# Altium PCB arduino.PcbDoc
Units mm, origin at the board's own origin, x right, y up, seen from the top; angles counter-clockwise.
Board outline 86.13 x 65.52 mm, 2 copper layers (Top Layer, Bottom Layer); 57 components, 54 nets, 236 pads, 41 vias.
Unrouted connection lines stored in the file: 4.
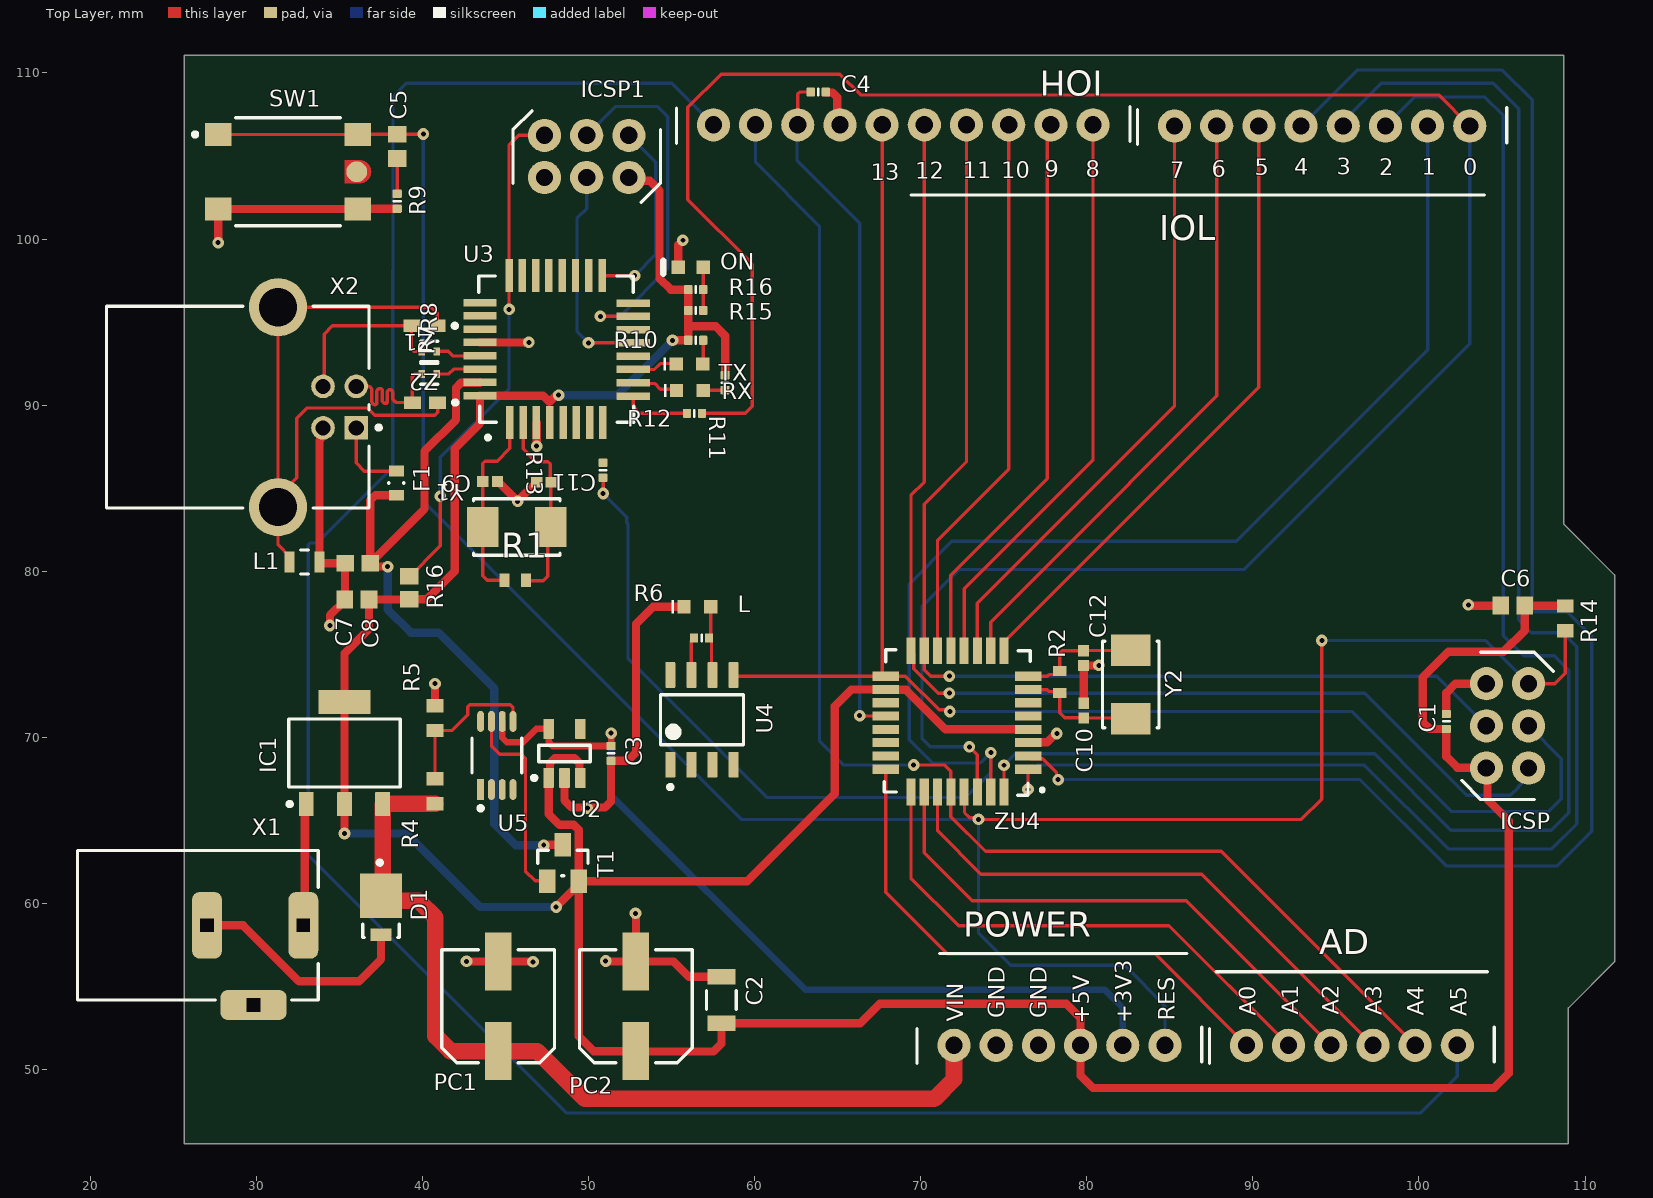
[diagram p0: Top Layer view]
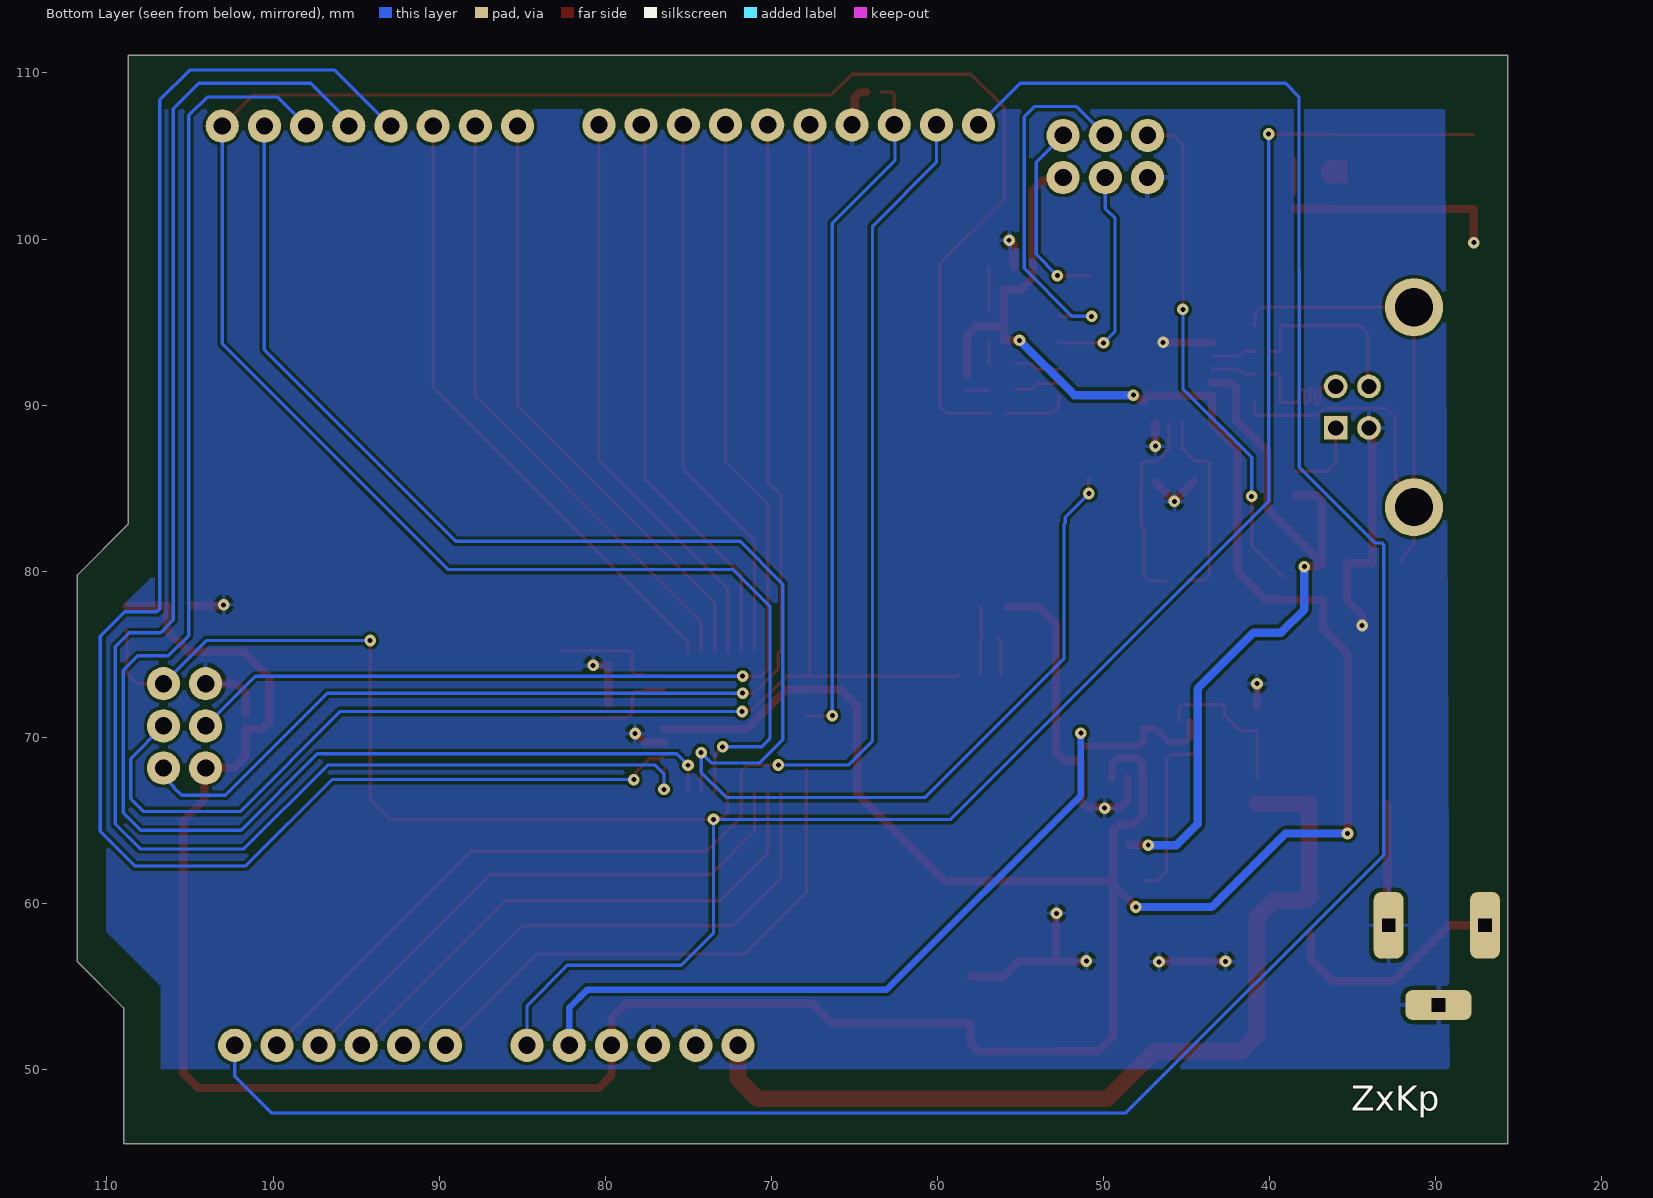
[diagram p1: Bottom Layer view, seen from below]
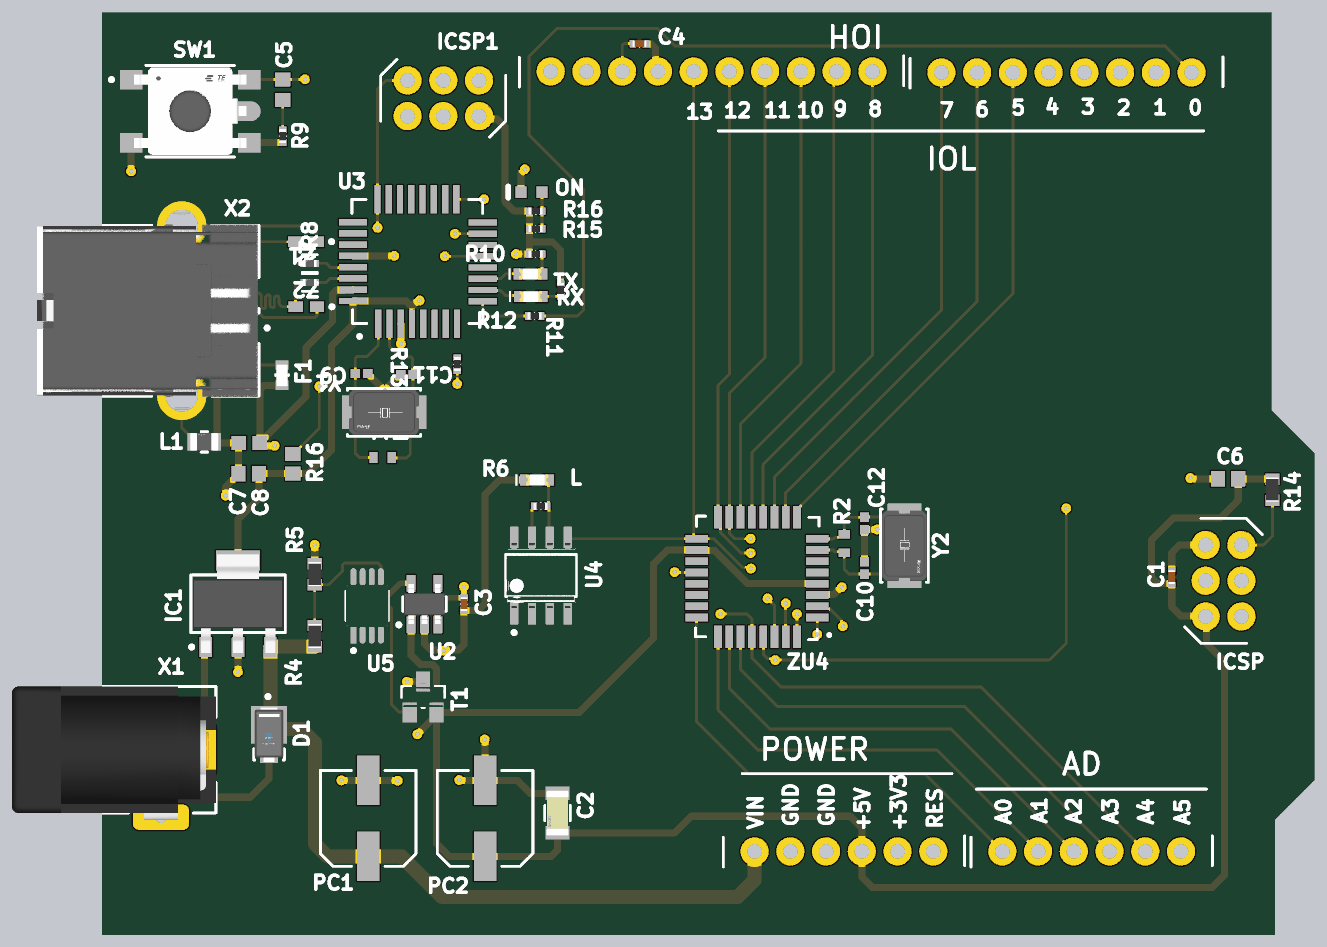
[diagram p2: 3D render of the assembled board from above, using the file's embedded part models]

## Layer stack, top to bottom
Top Solder: solder mask 0.0102, Solder Resist, Dk 3.5
Top Layer: signal copper 0.0356
Dielectric 1: dielectric 0.32, FR-4, Dk 4.8
Bottom Layer: signal copper 0.0356
Bottom Solder: solder mask 0.0102, Solder Resist, Dk 3.5

## Board outline
25.65,45.525 25.65,111.05 108.725,111.05 108.725,82.825 111.775,79.775 111.775,56.475 109,53.7 109,45.525

## Design rules (kind name [scope] priority, off if disabled: settings)
AssemblyTestPointUsage [All] p1: isadvanced=TRUE
AssemblyTestpoint [All] p1: isadvanced=TRUE testpointundercomponent=TRUE minsize=1.016 maxsize=2.54 preferedsize=1.524 minholesize=0 maxholesize=1.016 preferedholesize=0.813 testpointgrid=0.025 usegrid=TRUE gridtolerance=0 allowsidetop=TRUE allowsidebottom=TRUE
Clearance Clearance_3 [All] p1: isadvanced=TRUE gap=0.2 ignorepadtopadclearanceinfootprint=FALSE
Clearance Clearance_2 [All] p2: isadvanced=TRUE gap=0.2 ignorepadtopadclearanceinfootprint=FALSE
Clearance Clearance_1 [All] p3: isadvanced=TRUE gap=0.2 ignorepadtopadclearanceinfootprint=FALSE
Clearance [All] p4: isadvanced=TRUE gap=0.2 ignorepadtopadclearanceinfootprint=FALSE
Clearance Clearance_4_1 [OnMid vs OnMid] p5: gap=0.2 ignorepadtopadclearanceinfootprint=FALSE sourcerule=45 cellrowname=All cellrowtype=0 cellcolname=All cellcoltype=0 innerlayers=TRUE
Clearance Clearance_4_2 [(ExistsOnLayer('Top Layer') Or ExistsOnLayer('Bottom Layer')) vs (ExistsOnLayer('Top Layer') Or ExistsOnLayer('Bottom Layer'))] p6: gap=0.2 ignorepadtopadclearanceinfootprint=FALSE sourcerule=45 cellrowname=All cellrowtype=0 cellcolname=All cellcoltype=0 outerlayers=TRUE
Clearance Clearance_4 [All] p7: gap=0.2 ignorepadtopadclearanceinfootprint=FALSE ismatrix=TRUE
ComponentClearance [All] p1: isadvanced=TRUE gap=0.254 collisioncheckmode=3 verticalgap=0.254 showdistances=FALSE
FabricationTestPointUsage [All] p1: isadvanced=TRUE valid=0 allowmultiple=FALSE
FabricationTestpoint [All] p1: isadvanced=TRUE side=3 testpointundercomponent=TRUE minsize=1.016 maxsize=2.54 preferedsize=1.524 minholesize=0 maxholesize=1.016 preferedholesize=0.813 testpointgrid=0.025 allowsidetop=TRUE allowsidebottom=TRUE usegrid=TRUE gridtolerance=0
FanoutControl Fanout_BGA [IsBGA] p1: isadvanced=TRUE bgadir=Out bgaviamode=Centered fanoutstyle=Auto fanoutdirection=Alternating viagrid=0.025 // Fanout_BGA (Default Rule)
FanoutControl Fanout_LCC [IsLCC] p2: isadvanced=TRUE bgadir=Out bgaviamode=Centered fanoutstyle=Auto fanoutdirection=Alternating viagrid=0.025 // Fanout_LCC (Default Rule)
FanoutControl Fanout_SOIC [IsSOIC] p3: isadvanced=TRUE bgadir=Out bgaviamode=Centered fanoutstyle=Auto fanoutdirection=Alternating viagrid=0.025 // Fanout_SOIC (Default Rule)
FanoutControl Fanout_Small [(CompPinCount < 5)] p4: isadvanced=TRUE bgadir=Out bgaviamode=Centered fanoutstyle=Auto fanoutdirection=OutThenIn viagrid=0.025 // Fanout_Small (Default Rule)
FanoutControl Fanout_Default [All] p5: isadvanced=TRUE bgadir=Out bgaviamode=Centered fanoutstyle=Auto fanoutdirection=Alternating viagrid=0.025 // Fanout_Default (Default Rule)
Height [All] p1: isadvanced=TRUE minheight=0 maxheight=25.4 prefheight=12.7
HoleSize [All] p1: isadvanced=TRUE absolutevalues=TRUE maxlimit=2.54 minlimit=0.025 maxpercent=80.000 minpercent=20.000
HoleToHoleClearance [All] p1: isadvanced=TRUE gap=0.254 allowstackedmicrovias=TRUE
LayerPairs [All] p1: isadvanced=TRUE enforce=TRUE
MinimumSolderMaskSliver [All] p1: isadvanced=TRUE minsoldermaskwidth=0.254
NetAntennae [All] p1: isadvanced=TRUE netantennaetolerance=0
PasteMaskExpansion [All] p1: isadvanced=TRUE expansion=0
PlaneClearance [All] p1: isadvanced=TRUE clearance=0.508
PlaneConnect [All] p1: isadvanced=TRUE planeconnectstyle=Relief reliefexpansion=0.508 reliefentries=4 reliefconductorwidth=0.254 reliefairgap=0.254
PolygonConnect [All] p1: connectstyle=Relief reliefconductorwidth=0.254 reliefentries=4 polygonreliefangle="90 Angle" airgapwidth=0.254
RoutingCorners [All] p1: isadvanced=TRUE cornerstyle=45-Degree minsetback=2.54 maxsetback=2.54
RoutingPriority [All] p1: isadvanced=TRUE routingpriority=0
RoutingVias RoutingViaStyle_1 [All] p1: isadvanced=TRUE holewidth=0.3 width=0.7 viastyle="Through Hole" minholewidth=0.3 minwidth=0.6 maxholewidth=0.3 maxwidth=0.7
RoutingVias [All] p2: holewidth=0.711 width=1.27 viastyle="Through Hole" minholewidth=0.711 minwidth=1.27 maxholewidth=0.711 maxwidth=1.27
ShortCircuit [All] p1: isadvanced=TRUE allowed=FALSE
SilkToSilkClearance [All] p1: isadvanced=TRUE silktosilkclearance=0.254
SilkToSolderMaskClearance [IsPad] p1: isadvanced=TRUE minsilkscreentomaskgap=0.254 clearancetoexposedcopper=TRUE
SolderMaskExpansion [All] p1: isadvanced=TRUE expansion=0.102 istentingtop=FALSE
SupplyNets "Schematic Supply Nets_2" [InNet('GND')] p1: isadvanced=TRUE voltage=0.000
SupplyNets "Schematic Supply Nets_1" [InNet('+3V3')] p2: isadvanced=TRUE voltage=0.000
SupplyNets "Schematic Supply Nets" [InNet('+5V')] p3: isadvanced=TRUE voltage=0.000
UnRoutedNet [All] p1: isadvanced=TRUE
UnpouredPolygon [All] p1: isadvanced=TRUE
Width MaxMinWidth_1 [All] p1: isadvanced=TRUE maxlimit=1 minlimit=0.2 preferedwidth=0.2 minimp=50.000000 maximp=50.000000 favimp=50.000000
Width [All] p2: maxlimit=0.254 minlimit=0.254 preferedwidth=0.254
4 further rules are at their usual default settings.

## Components (designator, comment, footprint, x,y, rotation, side; value= is the part's Value field where it differs from the comment)
AD "6pins header" 6pinheader#1 89.609,51.45 r0 top
C1 "Capacitor 100nF +/-20% 50V 0402" CAPC0402(1005)60_L 101.65,70.95 r270 top value=100nF
C2 "100n" FP-C1206C-EB-MFG 58,54.175 r90 top value="0.10 μF"
C3 "Capacitor 1µF +/-20% 10V 0402" CAPC0402(1005)60_L 51.354,69.025 r270 top value=1µF
C4 "Capacitor 100nF +/-20% 50V 0402" CAPC0402(1005)60_L 63.825,108.85 r0 top value=100nF
C5 "100nF" CAPC1608X87X35ML15T15 38.475,105.575 r270 top
C6 "100nF" CAPC1608X87X35ML15T15 105.65,77.925 r0 top
C7 "100nF" CAPC1608X87X35ML15T15 36.05,78.296 r0 top
C8 "1nF" CAPC1608X90X35NL15T15 36.1,80.475 r0 top
C9 "22p" CAPC1005X56X25NL10T15 44.075,85.4 r180 top
C10 "22p" CAPC1005X56X25NL10T15 79.825,71.6 r270 top
C11 "22p" CAPC1005X56X25NL10T15 47.31,85.35 r0 top
C12 "22p" CAPC1005X56X25NL10T15 79.8,74.76 r90 top
D1 "AS1PM-M3/84A" FP-96547-MFG 37.5,59.75 r270 top value=10.4pF
F1 "SF-0603S050-2" FP-SF-0603S-MFG 38.425,85.3 r270 top value=232mΩ
IC1 "REG1117A-2.5" DCY0004A_L 35.3,69.05 r90 top
ICSP "2x3 header" header2x3 106.6,68.145 r90 top
ICSP1 "2x3 header" header2x3 52.425,106.24 r180 top
IOH "10pins header" "10pin header" 80.376,106.875 r180 top
IOL "8pin header" 8pin 103.06,106.8 r180 top
L "150060YS75000" WL-SMCW_0603_150060xx75000 56.55,77.85 r0 top
L1 "BLM21AG601SH1D" FP-BLM21-0_2-t0_85-e0_5-MFG 32.9,80.55 r180 top
ON "HSMG-C190" AVAG-HSMX-C190_V 56.15,98.3 r180 top
PC1 "47uF" NIC-CAPA2-6.3X5.8_V 44.55,53.8 r90 top
PC2 "47uF" NIC-CAPA2-6.3X5.8_V 52.85,53.8 r90 top
POWER "6pins header" 6pinheader#2 84.705,51.45 r180 top
R1 "1M" RESC1608X55X25LL10T15 45.575,79.45 r0 top
R2 "1M" RESC1608X55X25LL10T15 78.375,73.325 r90 top
R4 "Resistor 10k +/-1% 0603 100 mW" RESC1608X55X25ML10T15 40.75,66.75 r270 top value=10k
R5 "Resistor 10k +/-1% 0603 100 mW" RESC1608X55X25ML10T15 40.75,71.15 r270 top value=10k
R6 "Resistor 1K +/-5 % 0402 63 mW" RESC0402(1005)_L 56.8,75.975 r180 top value=1k
R7 "22E" FP-ESR01-MFG 40.4,91.875 r0 top
R8 "22E" FP-ESR01-MFG 40.4,93.225 r0 top
R9 "Resistor 1K +/-5 % 0402 63 mW" RESC0402(1005)_L 38.475,102.275 r90 top value=1k
R10 "Resistor 1K +/-5 % 0402 63 mW" RESC0402(1005)_L 56.45,93.9 r180 top value=1k
R11 "Resistor 1K +/-5 % 0402 63 mW" RESC0402(1005)_L 58.225,91.35 r90 top value=1k
R12 "Resistor 1K +/-5 % 0402 63 mW" RESC0402(1005)_L 56.375,89.5 r0 top value=1k
R13 "Resistor 1K +/-5 % 0402 63 mW" RESC0402(1005)_L 50.875,86.075 r270 top value=1k
R14 "Resistor 10k +/-1% 0603 100 mW" RESC1608X55X25ML10T15 108.8,77.154 r90 top value=10k
R15 "Resistor 1K +/-5 % 0402 63 mW" RESC0402(1005)_L 56.45,95.7 r0 top value=1k
R16 "Resistor 1K +/-5 % 0402 63 mW" RESC0402(1005)_L 56.45,96.95 r0 top value=1k
R16 "10k" RESC1608X50X30ML20T20 39.2,79 r270 top
RX "150060YS75000" WL-SMCW_0603_150060xx75000 56.1,90.875 r0 top
SW1 "FSM1LP" FP-FSM1LP-MFG 31.9,104.05 r0 top
T1 "FDN308P" FP-527AG-MFG 48.45,62.425 r90 top
TX "RX" WL-SMCW_0603_150060xx75000 56.075,92.475 r0 top
U2 "LP2985-33DBVR" DBV0005A_M 48.55,69.025 r90 top
U3 "ATMEGA8U2-MU" PCBComponent_1 47.975,93.319 r90 top
U4 "LM358DR" FP-D0008A-MFG 56.825,71.05 r90 top
U5 "LMV358IDGKR" FP-DGK0008A-IPC_C 44.475,68.9 r90 top
X1 "694106301002" 694106301002 26.475,58.675 r270 top
X2 "292304-2" FP-292304-2-MFG 28.875,89.875 r270 top
Y1 "16MHz" FP-ABM3-MFG 45.675,82.65 r180 top
Y2 "16MHz" FP-ABM3-MFG 82.65,73.175 r270 top
Z1 "CG0603MLC-05E" BOUR-CG0603-2_V 40.125,94.775 r180 top
Z2 "CG0603MLC-05E" BOUR-CG0603-2_V 40.15,90.15 r180 top
ZU4 "ATMEGA8" ATmega328P 72.175,70.95 r180 top

## Footprints (in the part's own frame and the unit in brackets; to place one, negate y for a bottom-side part, rotate by r counter-clockwise, add the part's x,y. Pads: shape width x height; smd on the part's side, far side on the other; paste and mask are expansions set on the pad)
6pinheader#1 [mm]
  round 2 hole 1.04: 71(0,0) 71(0,0) 71(0,0) 72(2.54,0) 73(5.08,0) 74(7.62,0) 75(10.16,0) 76(12.7,0)
  silkscreen extent -2.22,-1.1 14.92,1.1
6pinheader#2 [mm]
  round 2 hole 1.04: 1(0,0) 1(0,0) 2(2.54,0) 3(5.08,0) 4(7.62,0) 5(10.16,0) 6(12.7,0)
  silkscreen extent -2.22,-1.1 14.92,1.1
8pin [mm]
  round 2 hole 1.04: 78(0,0) 78(0,0) 78(0,0) 79(2.54,0) 80(5.08,0) 81(7.62,0) 82(10.16,0) 83(12.7,0) 84(15.24,0) 85(17.78,0)
  silkscreen extent -2.22,-1.1 20,1.1
"10pin header" [mm]
  round 2 hole 1.04: 86(0,0) 86(0,0) 87(2.54,0) 88(5.08,0) 89(7.62,0) 90(10.16,0) 91(12.7,0) 92(15.24,0) 93(17.78,0) 94(20.32,0) 95(22.86,0)
  silkscreen extent -2.22,-1.1 25.08,1.1
694106301002 [mm] "DC Power Jack Right Angled(6.4)"
  rrect50% 4x1.8 hole 0.8 square: 1(0,6.35) 2(0,0.55)
  rrect50% 1.8x4 hole 0.8 square: 3(4.8,3.35)
  silkscreen extent -4.5,-7.25 4.5,7.25, body extent -4.5,-7.25 5,7.25, height 10.75
ATmega328P [mm]
  rect 1.6x0.55 smd: 33(-4.287,2.875) 34(-4.287,2.075) 35(-4.287,1.275) 36(-4.287,0.475) 37(-4.287,-0.325) 38(-4.287,-1.125) 39(-4.287,-1.925) 40(-4.287,-2.725) 49(4.288,-2.725) 50(4.288,-1.925) 51(4.288,-1.125) 52(4.288,-0.325) 53(4.288,0.475) 54(4.288,1.275) 55(4.288,2.075) 56(4.288,2.875)
  rect 0.55x1.6 smd: 41(-2.837,-4.25) 42(-2.037,-4.25) 43(-1.237,-4.25) 44(-0.437,-4.25) 45(0.363,-4.25) 46(1.163,-4.25) 47(1.963,-4.25) 48(2.763,-4.25) 57(2.763,4.25) 58(1.963,4.25) 59(1.163,4.25) 60(0.363,4.25) 61(-0.437,4.25) 62(-1.237,4.25) 63(-2.037,4.25) 64(-2.837,4.25)
  silkscreen extent -5.22,-4.33 4.36,4.45
AVAG-HSMX-C190_V [mm] "SMD, 2-Leads, Body 1.6x0.8mm, Height 0.9mm"
  rect 0.8x0.8 smd: 1(-0.75,0) 2(0.75,0)
  silkscreen extent 1.65,-0.4 1.65,0.4, body extent -0.8,-0.4 0.8,0.4, height 0.9
BOUR-CG0603-2_V [mm] "SMD, 2-Leads, Body 1.6x0.8mm, Pitch 1.52mm"
  rect 1.02x0.76 smd: 1(-0.76,0) 2(0.76,0)
  silkscreen extent -1.94,-0.12 -1.7,0.12, body extent -0.8,-0.4 0.8,0.4, height 0.55
CAPC0402(1005)60_L [mm] "Chip Capacitor, Body 1.0x0.5mm, Height 0.6mm, IPC High Density"
  rrect25% 0.5x0.55 smd: 1(-0.45,0) 2(0.45,0)
  silkscreen extent 0,-0.2 0,0.2, body extent -0.5,-0.25 0.5,0.25, height 0.6
CAPC1005X56X25NL10T15 [mm] "Chip Capacitor, 2-Leads, Body 1.00x0.50mm, IPC Medium Density"
  rect 0.68x0.64 smd: 1(-0.44,0) 2(0.44,0)
  body extent -0.55,-0.3 0.55,0.3, height 0.56
CAPC1608X87X35ML15T15 [mm] "Chip Capacitor, 2-Leads, Body 1.60x0.80mm, IPC Low Density"
  rect 1x1.1 smd: 1(-0.725,0) 2(0.725,0)
  body extent -0.87,-0.48 0.87,0.47, height 0.87
CAPC1608X90X35NL15T15 [mm] "Chip Capacitor, 2-Leads, Body 1.60x0.81mm, IPC Medium Density"
  rect 1.05x1 smd: 1(-0.75,0) 2(0.75,0)
  body extent -0.88,-0.48 0.87,0.48, height 0.9
DBV0005A_M [mm] "SOT23, 5-Leads, Body 3.05x1.75mm, Pitch 0.95mm, IPC Low Density"
  rrect15% 1.2x0.65 smd: 1(-1.475,0.95) 2(-1.475,0) 3(-1.475,-0.95) 4(1.475,-0.95) 5(1.475,0.95)
  silkscreen extent -1.6,-1.55 0.5,1.95, body extent -1.42,-1.46 1.42,1.46, height 1.08
DCY0004A_L [mm] "SOT223, 4-Leads, Body 6.7x3.7mm, Pitch 2.3mm, IPC High Density"
  rrect11% 1.45x0.9 smd: 1(-3.075,2.3) 2(-3.075,0) 3(-3.075,-2.3)
  rrect7% 1.45x3.15 smd: 4(3.075,0)
  silkscreen extent -3.2,-3.35 2.05,3.42, body extent -3.5,-3.25 3.5,3.25, height 1.62
FP-527AG-MFG [mm]
  rect 1.4x1 smd paste+0 mask+0: 1(-1.1,0.95) 2(-1.1,-0.95) 3(1.1,0)
  silkscreen extent -0.76,-1.52 0.76,1.52, body extent -1.9,-1.62 1.9,1.62, height 0.25
FP-96547-MFG [mil]
  rect 105.12x100 smd paste+0 mask+0: 1(-27.5,0)
  rect 30x50 smd paste+0 mask+0: 2(65.06,0)
  silkscreen extent -111,-43 71,43, body extent -84,-54 84,54, height 10
FP-292304-2-MFG [mm]
  rect 1.42x1.42 hole 0.92 paste-2539.97 mask+0: 1(1.25,7.135)
  round 1.42 hole 0.92 paste-2539.97 mask+0: 2(-1.25,7.135) 3(-1.25,5.135) 4(1.25,5.135)
  round 3.5 hole 2.3 paste-2539.97 mask+0: 5(-6.02,2.425) 6(6.02,2.425)
  silkscreen extent -6.07,-7.91 6.07,8.61, body extent -7.87,-8.01 7.87,8.01, height 0.25
FP-ABM3-MFG [mm]
  rect 1.9x2.4 smd paste+0 mask+0: 1(-2.05,0) 2(2.05,0)
  silkscreen extent -2.6,-1.7 2.6,1.7, body extent -3.1,-1.8 3.1,1.8, height 0.25
FP-BLM21-0_2-t0_85-e0_5-MFG [mm]
  rect 0.6x1.25 smd paste+0 mask+0: 1(-0.9,0) 2(0.9,0)
  silkscreen extent -0.23,-0.72 0.23,0.72, body extent -1.3,-0.82 1.3,0.82, height 0.25
FP-C1206C-EB-MFG [mm]
  rect 0.95x1.7 smd paste+0 mask+0: 1(-1.4,0) 2(1.4,0)
  silkscreen extent -0.55,-0.9 0.55,0.9, body extent -2,-1 2,1, height 0.25
FP-D0008A-MFG [mm]
  rrect17% 1.55x0.6 smd paste+0 mask+0: 1(-2.7,1.905) 2(-2.7,0.635) 3(-2.7,-0.635) 4(-2.7,-1.905) 5(2.7,-1.905) 6(2.7,-0.635) 7(2.7,0.635) 8(2.7,1.905)
  silkscreen extent -4.17,-2.5 1.5,2.5, body extent -3.57,-2.75 3.57,2.75, height 0.25
FP-DGK0008A-IPC_C [mm]
  rect 1.257x0.418 smd paste+0 mask+0: 1(-2.051,0.975)
  rrect100% 1.257x0.418 smd paste+0 mask+0: 2(-2.051,0.325) 3(-2.051,-0.325) 4(-2.051,-0.975) 5(2.051,-0.975) 6(2.051,-0.325) 7(2.051,0.325) 8(2.051,0.975)
  silkscreen extent -3.3,-1.5 1.05,1.5, body extent -2.78,-1.6 2.78,1.6, height 0.25
FP-ESR01-MFG [mm]
  rect 0.4x0.5 smd paste+0 mask+0: 1(-0.45,0) 2(0.45,0)
  silkscreen extent -0.53,-0.63 0.53,0.63, body extent -0.75,-0.38 0.75,0.38, height 0.25
FP-FSM1LP-MFG [mm]
  rect 1.6x1.395 smd paste+0 mask+0: 1(-4.205,2.248) 2(4.205,2.248) 3(-4.205,-2.248) 4(4.205,-2.248)
  round 1.26 smd paste+0 mask+0: 5(4.139,0)
  Top Layer region: 3.405,0.7 4.307,0.7 4.574,0.647 4.801,0.496 4.952,0.269 5.005,0.002 5.005,0.002 5.005,-0.002 4.952,-0.269 4.801,-0.496 4.574,-0.647 4.307,-0.7 4.307,-0.7 3.405,-0.7
  silkscreen extent -5.72,-3.25 3.15,3.25, body extent -5.1,-3.35 5.11,3.35, height 0.25
FP-SF-0603S-MFG [mm]
  rect 0.65x0.9 smd paste+0 mask+0: 1(-0.725,0) 2(0.725,0)
  silkscreen extent -0.03,-0.45 0.03,0.45, body extent -1.15,-0.55 1.15,0.55, height 0.25
header2x3 [mm]
  round 2 hole 1.04: 65(0,0) 66(0,2.54) 67(2.54,0) 68(2.54,2.54) 69(5.08,0) 70(5.08,2.54)
  silkscreen extent -1.9,-1.49 6.98,4.03
NIC-CAPA2-6.3X5.8_V [mm] "Aluminum Electrolytic Capacitor, Diameter 6.3mm, Height 6.1mm, Pitch 5.4mm"
  rect 3.5x1.6 smd: 1(-2.7,0) 2(2.7,0)
  silkscreen extent -3.4,-3.4 3.4,3.4, body extent -3.14,-3.12 3.14,3.15, height 6.1
PCBComponent_1 [mm]
  rect 2x0.45 smd: 1(-4.375,2.713) 2(-4.375,1.913) 3(-4.375,1.113) 4(-4.375,0.313) 5(-4.375,-0.487) 6(-4.375,-1.287) 7(-4.375,-2.087) 8(-4.375,-2.887) 17(4.475,-2.837) 18(4.475,-2.037) 19(4.475,-1.237) 20(4.475,-0.437) 21(4.475,0.363) 22(4.475,1.163) 23(4.475,1.963) 24(4.475,2.763)
  rect 0.45x2 smd: 9(-2.775,-4.712) 10(-1.975,-4.712) 11(-1.175,-4.712) 12(-0.375,-4.712) 13(0.425,-4.712) 14(1.225,-4.712) 15(2.025,-4.712) 16(2.825,-4.712) 25(2.85,4.513) 26(2.05,4.513) 27(1.25,4.513) 28(0.45,4.513) 29(-0.35,4.513) 30(-1.15,4.513) 31(-1.95,4.513) 32(-2.75,4.513)
  silkscreen extent -5.39,-4.74 4.45,4.59
RESC0402(1005)_L [mm] "Chip Resistor, Body 1.0x0.5mm, IPC High Density"
  rrect25% 0.5x0.55 smd: 1(-0.45,0) 2(0.45,0)
  silkscreen extent 0,-0.2 0,0.2, body extent -0.5,-0.25 0.5,0.25, height 0.3
RESC1608X50X30ML20T20 [mm] "Chip Resistor, 2-Leads, Body 1.60x0.80mm, IPC Low Density"
  rect 1x1.1 smd: 1(-0.7,0) 2(0.7,0)
  body extent -0.9,-0.5 0.9,0.5, height 0.5
RESC1608X55X25LL10T15 [mm] "Chip Resistor, 2-Leads, Body 1.70x0.90mm, IPC High Density"
  rect 0.6x0.8 smd: 1(-0.65,0) 2(0.65,0)
  body extent -0.85,-0.45 0.85,0.45, height 0.55
RESC1608X55X25ML10T15 [mm] "Chip Resistor, 2-Leads, Body 1.70x0.90mm, IPC Low Density"
  rect 0.8x1 smd: 1(-0.75,0) 2(0.75,0)
  body extent -0.85,-0.45 0.85,0.45, height 0.55
WL-SMCW_0603_150060xx75000 [mm] "SMD Mono-color Chip LED, body 1.6x0.8mm"
  rect 0.8x0.8 smd: 1(-0.8,0) 2(0.8,0)
  silkscreen extent -1.55,-0.4 -1.4,0.4, body extent -0.8,-0.4 0.8,0.4, height 0.7

## Part data
C1 C4: library part CMP-001-00067-3, "Chip Capacitor, 100nF +/-20%, 50V, 0402, Thickness 0.6 mm", Case/Package=0402, Max Operating Temperature=85°C, Min Operating Temperature=-55°C, Tolerance=10%, Voltage Rating=50V, Mounting Technology=SMT, Pins=2
C2: library part CMP-1037-04222-2, "CAP CER 0.1UF 200V 10% X7R 1206", Capacitance="0.10 μF", Manufacturer=KEMET, Manufacturer Part Number=C1206C104K2RACTU, Package=C1206C-EB, Temperature="-55°C to +150°C", Temperature Characteristic=X7R, Temperature Coefficient=15%, Temperature Range High=+150°C, Temperature Range Low=-55°C, Tolerance=0.1, Voltage Rating="200 V", Automotive=Yes, Automotive Grade="Grade 0", Category=Cap, ComponentLink2Description=Datasheet, ComponentLink2URL=https://content.kemet.com/datasheets/KEM_C1007_X8R_ULTRA_150C_SMD.pdf, Device Class L1="Passive Components", Device Class L2=Capacitors, Device Class L3="Ceramic Capacitors", Digikey Description="CAP CER 0.1UF 200V 10% X7R 1206", Height=0.88mm, Ipc Land Pattern Name=CAPC320160X78, Lead Free=Yes, Material=Ceramic, Mouser Description="Multilayer Ceramic Capacitors MLCC - SMD/SMT 200volts 0.1uF X7R 10%", Octopart=https://octopart.com/c1206c104k2ractu-kemet-9138344, RoHS=TRUE
C3: library part CMP-001-00063-3, "Chip Capacitor, 1µF +/-20%, 10V, 0402, Thickness 0.6 mm", Case/Package=0402, Max Operating Temperature=85°C, Min Operating Temperature=-55°C, Tolerance=10%, Voltage Rating=10V, Mounting Technology=SMT, Pins=2
C5 C6 C7: library part CMP-2006-03295-1, Manufacturer=Kemet, Part Number=C0603T104K3RCLTU
C8: library part CMP-2006-04069-1, Manufacturer="AVX Interconnect / Elco", Part Number=06031C102KAT4A
C9 C10 C11 C12: library part CMP-1034-00918-2, Manufacturer="AVX Interconnect / Elco", Part Number=04025A220KAT2A
D1: library part CMP-02540-000039-1, "DIODE AVALANCHE 1KV 1.5A DO220", Capacitance=10.4pF, Forward Current=1.5A, Manufacturer=Vishay, Max Junction Temp=+175°C, Max Repetitive Reverse Voltage=1000V, Max Surge Forward Current=30A, Package=96547, Peak Reverse Current=0.3uA, Temperature="-55°C to +175°C", Temperature Range Low=-55°C, Automotive=Yes, Automotive Grade="Grade 0", Category=Diode, ComponentLink2Description=Datasheet, ComponentLink2URL=https://www.vishay.com/docs/89290/as1pm.pdf, Device Class L1="Discrete Semiconductors", Device Class L2=Diodes, Device Class L3="Rectifier Diodes", Digikey Description="DIODE AVALANCHE 1KV 1.5A DO220", Footprint Url=https://www.vishay.com/docs/96547/smp_do-220aa.pdf, Height=1.15mm, Lead Free=Yes, Manufacturer Part Number=AS1PM-M3/84A, Mouser Description="AS1PM-M3/84A; SMT Avalanche Diode; 1000V 1.5A; 1.5us; 2-Pin DO-220AA", Octopart=https://octopart.com/as1pm-m3%2F84a-vishay-44629776, RoHS=TRUE, Temperature Range High=+175°C
F1: library part CMP-07399-000004-1, "FUSE BOARD MNT 500MA 50VDC 0603", Fuse Current=0.5A, Fuse Interrupt Ac Current=50A, Manufacturer="Bourns Inc.", Max Fuse Ac Voltage=35V, Max Fuse Dc Voltage=50V, Package=SF-0603S, Resistance=232mΩ, Temperature="-20°C to +105°C", Temperature Range High=+105°C, Temperature Range Low=-20°C, Automotive=No, Category=Fuse, ComponentLink2Description=Datasheet, ComponentLink2URL=https://www.bourns.com/docs/product-datasheets/sf0603s.pdf, Device Class L1="Circuit Protection", Device Class L2=Fuses, Device Class L3=unset, Digikey Description="FUSE BOARD MNT 500MA 50VDC 0603", Fuse Blow Speed=Slow, Fuse I2T=0.009A2Sec, Fuse Interrupt Dc Current=50A, Height=0.55mm, Ipc Land Pattern Name=CAPC16080X45, Lead Free=Yes, Manufacturer Part Number=SF-0603S050-2, Mouser Description="Surface Mount Fuses 0.50A Slow Blow SinglFuse", Octopart=https://octopart.com/sf-0603s050-2-bourns-10486821, RoHS=TRUE
IC1: library part CMP-0395-00519-2, "Single Output LDO, 1 A, Fixed 2.5 V Output, 3.8 to 15 V Input, with Internal Current Limiting, 4-pin SOT-223 (DCY), -40 to 125 degC, Green (RoHS & no Sb/Br)", Manufacturer="Texas Instruments", Rating=Catalog, Code_JEDEC=TO-261, ComponentLink1Description="Manufacturer URL", ComponentLink1URL=http://www.ti.com/, ComponentLink2Description=Datasheet, ComponentLink2URL=http://www.ti.com/general/docs/lit/getliterature.tsp?genericPartNumber=REG1117A-25&fileType=pdf, ComponentLink3Description="Package Specification", ComponentLink3URL=http://www.ti.com/litv/pdf/mpds094a, DatasheetVersion=SBVS001D, Eco-Plan="Green (RoHS & no Sb/Br)", Fixed Output Options(V)=2.5, Iout(Max)(A)=1, Iq(Typ)(mA)=4, Mounting Technology="Surface Mount", PackageDescription="4-Pin Plastic Small Outline, Body 3.5 x 6.5 mm, Pitch 2.3 mm", PackageReference=DCY0004A, PackageVersion=4202506/B, PartNumber=REG1117A-2.5, SubFamily="Single Channel LDO", Vdo(Typ)(mV)=1200, Vin(Max)(V)=15, Vin(Min)(V)=3.8, Vout Adj(Max)(V)=2.5, Vout Adj(Min)(V)=2.5
L RX TX: library part CMP-1426-00005-2, Case Code (Imperial)=0603, Case Code (Metric)=1608, Color=Yellow, Forward Current=100mA, Forward Voltage=2V, Max Junction Temperature (Tj)=95°C, Max Operating Temperature=85°C, Max Reverse Voltage (DC)=5V, Min Operating Temperature=-40°C, Power Dissipation=72mW, Test Current=20mA, Case/Package=0603, Dominant Wavelength=590nm, Height=700µm, Length=1.6mm, Lens Style="Clear, Rectangular", Luminous Intensity=120mcd, Mount="Surface Mount", NexarPartId=29687085, Packaging="Tape and Reel", Peak Wavelength=595nm, REACH SVHC=Unknown, Reverse Voltage=5V, RoHS=Compliant, Viewing Angle=140°, Wavelength=590nm, Width=800µm
L1: library part CMP-06046-002599-1, "Chip Ferrite Bead, 0805, 600Ω @ 100MHz, 0.2Ω, 25%, 700mA", Case Code (Imperial)=0805, Case Code (Metric)=2012, DC Resistance (DCR)=210mR, Max Current Rating=600mA, Max DC Current=200mA, Max Operating Temperature=125°C, Min Operating Temperature=-55°C, Package Quantity=4000, Ratings=AEC-Q200, Test Frequency=100MHz, Tolerance=25%, Case/Package=0805, Contact Plating=Tin, Height=0.041inch, Impedance=600R, Lead Free="Lead Free", Length=2mm, Mount="Surface Mount", Number of Circuits=1, Number of Lines=1, Packaging="Tape and Reel", REACH SVHC="No SVHC", RoHS Compliant=Yes, Series="EMIFIL®, BLM21A", Termination=SMD/SMT, Width=0.049inch
ON: library part CMP-007-00013-2, "LED Uni-Color Green, 52 mW, 20 mA, -40 to 85 degC, 2-Pin SMD, RoHS, Tape and Reel", Case/Package=0603, Colour=Green, Forward Current=20mA, Forward Voltage=2.2V, Manufacturer=Avago, Max Operating Temperature=85°C, Min Operating Temperature=-40°C, Package Description="2-Pin Surface Mount Device, Body 1.6 x 0.8 mm, Height 0.9 mm", Package Quantity=4000, Package Reference=HSMX-C190, Power=52mW, Datasheet URL=http://docs.avagotech.com/docs/AV02-0551EN, Datasheet Version=Mar-12, Illumination Colour=Green, Lens Style=Diffused, Luminous Intensity=15mcd, Manufacturer URL=http://www.avagotech.com/, Mounting Technology=SM, Nominal Vf=2.2V, Packaging=TapeandReel, Pins=2, RoHS Compliant=True, Viewing Angle=170degrees
PC1 PC2: library part CMP-0687-00039-1, "Aluminum Electrolytic Capacitor, UD Series, Low Impedance, 47 uF, 25 V, + / - 20%, -55 to 105 degC, Chip Type, 6.3 x 5.8 mm D x L, Pb-Free, Reel", Manufacturer=Nichicon, PartNumber=UUD1E470MCL1GS, Rated Capacitance="47 uF", Rated Ripple Current (at 100kHz)="230 mA", Rated Voltage="25 V", Tolerance Rated Capacitance="-20 to 20%", ComponentLink1Description="Manufacturer URL", ComponentLink1URL=http://www.nichicon.co.jp/, ComponentLink2Description=Datasheet, ComponentLink2URL=http://products.nichicon.co.jp/en/pdf/XJA043/e-ud.pdf, ComponentLink3Description="Package Specification", ComponentLink3URL=http://products.nichicon.co.jp/en/pdf/XJA043/e-ud.pdf, DatasheetVersion=08/2012, Diameter="6.3 mm", Endurance Time="2000 h", Impedance="0.44 Ohm", Length="5.8 mm", Mounting Technology="Surface Mount", PackageDescription="2-Pin Surface Mount Device, Diameter 6.3 mm, Height 5.8 mm, Pitch 5.4 mm", PackageReference=CAPAE-D6.3H5.8, Packing="Dia382mm Reel", RoHS=TRUE
R1 R2: library part CMP-1659-00056-1, "Chip Resistor, 1 MOhm, +/- 1%, 100 mW, -55 to 155 degC, 0603 (1608 Metric), RoHS, Tape and Reel", Capacitance="1 mF", Case\Package=Radial, Max Operating Temperature="85 degC", Min Operating Temperature="-40 degC", Package Quantity=200, Tolerance=20%, Voltage Rating="25 V", ComponentLink1Description="Manufacturer URL", ComponentLink1URL=http://www.yageo.com/, ComponentLink2Description=Datasheet, ComponentLink2URL=http://www.yageo.com/documents/recent/PYu-RC_Group_51_RoHS_L_04.pdf, DatasheetVersion="Rev. 4, 02/2016", Diameter="10 mm", Height="20 mm", Lead Pitch="5 mm", Length="20 mm", Mount="Through Hole", PackageDescription="2-Pin Surface Mount Device, Body 1.6 x 0.8 mm", PackageReference=0603, Packaging=Bulk, Radiation Hardening=No, REACH SVHC="No SVHC", RoHSCompliant=true, Voltage Rating (DC)="25 V", Width="0 inch"
R4 R5 R14: library part CMP-009-00017-5, "Chip Resistor, 10 KOhm, +/- 1%, 01 W, -55 to 155 degC, 0603 (1608 Metric)", Case/Package=0603, Max Operating Temperature=155°C, Min Operating Temperature=-55°C, Power=100mW, Tolerance=1%, Voltage Rating=50V, Mounting Technology=SM, Pins=2, RoHS Compliant=True
R6 R9 R10 R11 R12 R13 R15 R16: library part CMP-009-00157-3, "Chip Resistor, 1 kOhms, +/-5 %, 63 mW, -55 to 155 degC, 0402", Case/Package=0402, Max Operating Temperature=155°C, Min Operating Temperature=-55°C, Power=63mW, Tolerance=5%, Pins=2
R7 R8: library part CMP-08839-028734-1, "22Ω ±5% 0.2W 0402 Anti-Surge Chip Resistor AEC-Q200", Case Code (Imperial)=0402, Case Code (Metric)=1005, Max Operating Temperature=155°C, Max Power Dissipation=200mW, Min Operating Temperature=-55°C, Package Quantity=1, Resistance=22R, Resistor Type="Thick Film", Temperature Coefficient=200ppm/°C, Tolerance=5%, Case/Package=0402, Features="Automotive AEC-Q200", Height=0.016inch, Length=0.039inch, Number of Terminations=2, Packaging="Cut Tape", RoHS Compliant=Yes, Series=ESR, Width=0.02inch
R16: library part CMP-2000-02822-1, Manufacturer=Susumu, Part Number=RG1608N-103-W-T1
SW1: library part CMP-03402-000015-1, "SWITCH TACTILE SPST-NO 0.05A 24V", Actuator Color=Black, Contact Current Rating=50mA, Contact Resistance=100mR, Max Operating Temperature=85°C, Max Voltage Rating (DC)=12V, Min Operating Temperature=-35°C, Operating Force=1.57N, Package Quantity=2000, Actuator Length=0.01inch, Actuator Material=Polyphthalamide, Actuator Type=Standard, Contact Material="Copper Alloy", Contact Plating=Silver, Current Rating=50mA, Depth=8mm, Electrical Life=100000Cycles, ELV=Compliant, Illumination Type=Non-Illuminated, Lead Free="Lead Free", Length=6.19mm, Max Current Rating=50mA, Mechanical Life=100000Cycles, Mount="Surface Mount", Orientation=Straight, Packaging="Loose Piece", REACH SVHC="No SVHC", RoHS Compliant=Yes, Series=FSM1LP, Switch Function=Off-Mom, Switch Travel=0.25mm, Termination="Gull Wing", Throw Configuration=SPST, Type=Switch, Voltage Rating (DC)=12V
T1: library part CMP-07173-000119-1, "MOSFET P-CH 20V 1.5A SSOT-3", Case/Package=TO-236-3, Continuous Drain Current (ID)=1.5A, Current Rating=-1.5A, Drain to Source Breakdown Voltage=-20V, Drain to Source Resistance=86mR, Drain to Source Voltage (Vdss)=20V, Gate to Source Voltage (Vgs)=12V, Input Capacitance=341pF, Max Operating Temperature=150°C, Max Power Dissipation=500mW, Min Operating Temperature=-55°C, On-State Resistance=125MR, Package Quantity=1, Threshold Voltage=-1V, Element Configuration=Single, Fall Time=10ns, Height=0.94mm, Lead Free="Lead Free", Length=2.92mm, Mount="Surface Mount", Nominal Vgs=-1V, Number of Elements=1, Number of Pins=3, Packaging="Tape and Reel", Power Dissipation=500mW, Rds On Max=125mR, REACH SVHC="No SVHC", Rise Time=10ns, Turn-Off Delay Time=12ns, Turn-On Delay Time=8ns, Voltage Rating (DC)=-20V, Weight=0.03g, Width=1.4mm
U2: library part CMP-0758-00080-2, "Single Output Low Noise LDO, 150 mA, Fixed 3.3 V Output, 1.5% Tolerance, 2.2 to 16 V Input, Low IQ, 5-Pin SOT-23 (DBV), -40 to 125 degC, Green (RoHS & no Sb/Br), Tape and Reel", Manufacturer="Texas Instruments", Operating Temperature Range (degC)="-40 to 125", Accuracy (%)=1.5, ComponentLink1Description="Manufacturer URL", ComponentLink1URL=http://www.ti.com/, ComponentLink2Description=Datasheet, ComponentLink2URL=http://www.ti.com/lit/ds/symlink/lp2985-50.pdf, ComponentLink3Description="Package Specification", ComponentLink3URL=http://www.ti.com/litv/pdf/mpds018j, DatasheetVersion=SLVS522N, Fixed Output Options (V)=3.3, Iout (Max) (A)=0.15, Iq (Typ) (mA)=0.85, Mounting Technology="Surface Mount", Output Options="Fixed Output", PackageDescription="5-Pin Plastic Small Outline, Body 2.9 x 1.6 mm, Pitch 0.95 mm", PackageReference=DBV0005A, PackageVersion=4073253-4/L, Packing="Tape and Reel", PartNumber=LP2985-33DBVR, RoHS=TRUE, Vdo (Typ) (mV)=280, Vin (V)="2.2 to 16"
U4: library part CMP-1685-00009-2, "IC OPAMP GP 2 CIRCUIT 8SOIC", Case/Package=SOIC, Dual Supply Voltage=9V, Input Bias Current=250nA, Input Offset Voltage (Vos)=7mV, Max Dual Supply Voltage=16V, Max Operating Temperature=70°C, Max Supply Voltage=32V, Min Dual Supply Voltage=1.5V, Min Operating Temperature=0°C, Min Supply Voltage=3V, Nominal Supply Current=1.2mA, Operating Supply Current=1mA, Output Current=30mA, Package Quantity=2500, Power Supply Rejection Ratio (PSRR)=65dB, Voltage Gain=100dB, Bandwidth=700kHz, Common Mode Rejection Ratio=65dB, Contact Plating=Gold, Gain Bandwidth Product=700kHz, Height=1.58mm, Lead Free="Lead Free", Length=4.9mm, Mount="Surface Mount", Number of Amplifiers=2, Number of Channels=2, Number of Circuits=2, Number of Elements=2, Number of Pins=8, Operating Supply Voltage=16V, Output Current per Channel=30mA, Packaging="Tape and Reel", Radiation Hardening=No, REACH SVHC="No SVHC", Slew Rate=0.3V/µs, Unity Gain Bandwidth Product=700kHz, Width=3.91mm
U5: library part CMP-2100-03651-2, "IC OPAMP GP 2 CIRCUIT 8VSSOP", Case/Package=MSOP, Input Bias Current=250nA, Input Offset Voltage (Vos)=7mV, Max Operating Temperature=125°C, Max Supply Voltage=5.5V, Min Operating Temperature=-40°C, Min Supply Voltage=2.7V, Nominal Supply Current=440uA, Operating Supply Current=210uA, Output Current=160mA, Package Quantity=1, Power Supply Rejection Ratio (PSRR)=50dB, Voltage Gain=100dB, Bandwidth=1MHz, Common Mode Rejection Ratio=50dB, Contact Plating=Gold, Gain Bandwidth Product=1MHz, Height=0.97mm, Lead Free="Lead Free", Length=3mm, Mount="Surface Mount", Number of Amplifiers=2, Number of Channels=2, Number of Circuits=2, Number of Elements=2, Number of Pins=8, Output Current per Channel=160mA, Packaging="Tape and Reel", Radiation Hardening=No, REACH SVHC="No SVHC", Slew Rate=1V/µs, Unity Gain Bandwidth Product=1MHz, Width=3mm
X1: library part CMP-1502-00188-2, Color=Black, Current Rating=5A, Flammability Rating="UL94 V-0", Insulation Resistance=100MΩ, Max Operating Temperature=85°C, Min Operating Temperature=-40°C, Operating Supply Voltage=24V, Voltage Rating (DC)=20V, Connector Type=Power, Contact Gender=Female, Contact Material="Gold, Tin", Contact Plating=Tin, Gender=Male, Height=11mm, Housing Material=Polyamide, Mount="Through Hole", NexarPartId=52676100, Number of Contacts=3, Packaging=Bulk, REACH SVHC=Unknown, RoHS=Compliant, Shielding=Unshielded, Termination="Through Hole", Voltage Rating=24V
X2: library part CMP-03360-000001-1, "CONN RCPT USB2.0 TYPEB 4POS R/A", Current Rating=1A, Manufacturer="TE Connectivity", Temperature="-55°C to +85°C", Temperature Range High=+85°C, Temperature Range Low=-55°C, Automotive=No, Category=Conn, ComponentLink2Description=Datasheet, ComponentLink2URL=https://upverter.com/datasheet/eb4ef8d2f908e3ccc324fdf977e2747da9451c92.pdf, Conn Orientation="Right Angle", Contact Material=Gold,Nickel, Device Class L1=Connectors, Device Class L2="USB Connectors", Device Class L3=unset, Digikey Description="CONN RCPT USB2.0 TYPEB 4POS R/A", Height=11.5mm, Is Female=yes, Lead Free=Yes, Manufacturer Part Number=292304-2, Mouser Description="USB Connectors RECEPTACLE TYPE B", Number of Contacts=4, Octopart=https://octopart.com/292304-2-te+connectivity-39545353, Package=292304-2, Pitch=2.5mm, RoHS=TRUE, Shielding=true, Usb Standard="USB 2.0"
Y1 Y2: library part CMP-27762-013555-1, "Crystal 16MHz ±20ppm 18pF SMD-2 5mm x 3.2mm", Case/Package=CSMD, ESR (Equivalent Series Resistance)=40R, Frequency Stability=50ppm, Frequency Tolerance=20ppm, Load Capacitance=18pF, Max Operating Temperature=70°C, Min Operating Temperature=-20°C, Operating Frequency="16 MHz", Package Quantity=1000, Resistor Type=Ceramic, Series Resistance=60R, Accuracy=20ppm, Depth=3.2mm, Frequency=16MHz, Height=0.051inch, Lead Free="Lead Free", Length=5mm, Mount="Surface Mount", Number of Pins=2, Packaging="Tape and Reel", REACH SVHC=Yes, Series=ABM3, Termination=SMD/SMT, Tolerance=20ppm, Width=3.2mm
Z1 Z2: library part CMP-0584-00001-2, "ESD Protector, 5 V Supply, -40 to 85 degC, 1.6 x 0.8 x 0.55 mm SMD, RoHS, Tape and Reel", Manufacturer=Bourns, Operating Temperature="-40 to 85 degC", CO="0.5 pF", ComponentLink1Description="Manufacturer URL", ComponentLink1URL=http://www.bourns.com/, ComponentLink2Description=Datasheet, ComponentLink2URL=http://www.bourns.com/data/global/pdfs/MLC.pdf, DatasheetVersion="Rev. S", Mounting Technology="Surface Mount", PackageDescription="2-Pin SMD, Body 1.6 x 0.8 mm, Pitch 1.52 mm", PackageReference=CG0603-2, Packing="Tape and Reel", PartNumber=CG0603MLC-05E, RoHS=TRUE, RT="1 ns", VC="20 V", VDC="5 V", VT="150 V"

## Via types
v1: diameter 0.7, hole 0.3, Top Layer to Bottom Layer, 41 vias

## Nets (pads, with @x,y where several pads share a name; then routed paths per layer and width w, separated by ;. In a path a pad name is that pad's centre, name@x,y a point inside that pad or via, vN(x,y) a via of type N, cw(c..) or ccw(c..) an arc to the next point about the centre after c; other vN are vias at no path point)
+3V3: C3.1 POWER.2 U2.5 U5.6 | length 51.8
  Top Layer w0.4: U5.6@44.803,70.954 U5.6 44.803,70.947 44.803,69.972 45.075,69.7 46.05,69.7 46.85,70.5 47.55,70.5 47.575,70.525 U2.5 47.6,69.709 47.834,69.475 C3.1 v1(51.354,70.246) v1@51.35,70.25
  Bottom Layer w0.4: v1(51.354,70.246) 51.354,66.496 63.05,54.8 81.075,54.8 82.165,53.71 POWER.2
+5V: C1.2 C2.1 C6.2 C7.2 IC1.2 IC1.4 ICSP1.66 ICSP.66 PC2.1 POWER.3 R10.2 R11.2 R14.2 R15.1 R16.1@56,96.95 R16.2@39.2,78.3 T1.2 U2.1 U2.3 U3.4 U3.32 ZU4.36 ZU4.50 | length 238.1
  Top Layer w0.5: v1(35.3,64.2) IC1.2 IC1.4 35.3,75.05 36.775,76.525 C7.2 36.777,78.298 39.198,78.298 39.2,78.3 40.25,78.3 41.95,80 41.95,87.375 43.462,88.887 U3.32 47.25,90.569 47.637,90.182 48.055,90.6 v1(48.2,90.6) ; v1(48.05,59.775) T1.2@49.4,61.125 ; U2.3 49.45,67.6 49.45,68.457 49.157,68.75 47.968,68.75 47.675,68.457 47.675,67.625 U2.1 47.6,65.375 48.25,64.725 49.107,64.725 49.4,64.432 T1.2 ; ICSP1.66 52.625,103.5 53.7,103.5 54.275,102.925 54.275,97.625 54.95,96.95 56,96.95 R15.1 56,94.8 ; v1(55.05,93.9) R10.2 56,94.8 ; R11.2 58.225,94.175 57.65,94.75 56.05,94.75 56,94.8 ; ZU4.36 71.497,70.475 69.122,72.85 67.912,72.85 ZU4.50 65.825,72.875 64.825,71.875 64.825,66.6 59.55,61.325 T1.2 ; R14.2 108.79,77.915 106.385,77.915 C6.2 106.375,76.425 105.1,75.15 101.775,75.15 100.225,73.6 100.225,70.925 100.65,70.5 C1.2 101.65,68.825 102.31,68.165 104.04,68.165 ICSP.66 104.125,68.08 104.125,66.25 105.4,64.975 105.4,49.75 104.525,48.875 80.375,48.875 79.625,49.625 POWER.3 79.625,53.1 78.775,53.95 67.525,53.95 66.35,52.775 C2.1 58,51.55 57.525,51.075 52.875,51.075 PC2.1 50.3,51.1 49.4,52 T1.2@49.4,61.125 ; T1.2@49.4,61.125 T1.2
  Bottom Layer w0.5: v1(35.3,64.2) 39.05,64.2 43.475,59.775 v1(48.05,59.775) ; v1(48.2,90.6) 51.75,90.6 v1(55.05,93.9)
AD4: AD.75 IOH.94 ZU4.60 | length 83.7
  Top Layer w0.2: v1(69.575,68.325) 71.45,68.325 71.812,67.963 ZU4.60 71.812,65.213 73.9,63.125 88.094,63.125 AD.75
  Bottom Layer w0.2: IOH.94 60.056,104.619 63.9,100.775 63.9,69.8 65.375,68.325 v1(69.575,68.325)
AD5: AD.76 IOH.95 | length 147.1
  Bottom Layer w0.2: IOH.95 55.016,109.375 39.025,109.375 38.225,108.575 38.225,98.15 38.2,98.125 38.2,86.25 33.65,81.7 33.242,81.7 33.125,81.583 33.125,62.9 48.65,47.375 100.1,47.375 102.309,49.584 AD.76
AREF: C4.1 IOH.93 ZU4.52 | length 41.4
  Top Layer w0.2: IOH.93 62.596,108.733 62.713,108.85 C4.1 ; v1(66.325,71.3) 66.35,71.275 ZU4.52
  Bottom Layer w0.2: IOH.93 62.55,106.829 62.55,104.725 66.325,100.95 v1(66.325,71.3)
CMP: R4.1 R5.2 U5.5 | length 9.4
  Top Layer w0.2: R4.1 R5.2 41.775,70.4 42.725,71.35 42.725,71.833 42.842,71.95 45.275,71.95 45.45,71.775 U5.5
GND: C1.1 C2.2 C3.2 C4.2 C6.1 C7.1 C8.1 C9.1 C10.1 C11.1 C12.1 IC1.1 ICSP1.70 ICSP.70 IOH.92 L1.1 L.1 ON.2 PC1.2 PC2.2 POWER.4 POWER.5 R5.1 R9.1 SW1.3 SW1.4 U2.2 U3.3 U3.28 X1.1 X1.3 X2.4 ZU4.35 | length 92.5
  Top Layer w0.5: v1@27.7,99.775 v1(27.695,99.78) SW1.3 SW1.4 36.128,101.825 R9.1 ; X1.1 32.913,58.763 32.913,65.888 IC1.1 ; L1.1@33.8,80.525 33.85,80.475 C8.1 35.338,80.463 35.338,78.308 C7.1 35.325,78.246 34.425,77.346 v1(34.425,76.725) ; L1.1 33.8,87.872 33.834,87.906 33.834,88.449 X2.4 ; R5.1 v1(40.75,73.225) ; v1(42.65,56.5) PC1.2 46.625,56.5 v1(46.65,56.475) ; U3.28 46.394,93.769 v1(46.4,93.775) ; C9.1 44.535,85.4 v1@45.725,84.21 ; v1(45.725,84.2) v1@45.725,84.21 ; U3.3 46.875,88.932 v1(46.875,87.525) ; C11.1 46.85,85.35 45.725,84.225 v1@45.725,84.21 ; U2.2 48.55,66.2 48.987,65.763 49.887,65.763 v1(49.925,65.725) 49.963,65.763 50.988,65.763 51.354,66.129 C3.2 52.35,68.575 52.85,69.075 52.85,76.825 53.875,77.85 L.1 ; v1(51.025,56.525) 51.05,56.5 PC2.2 ; v1(52.825,59.4) 52.85,59.375 PC2.2 ; ON.2 55.4,99.65 v1(55.675,99.925) ; C2.2 56.05,55.575 55.125,56.5 PC2.2 ; C4.2 64.275,108.825 64.682,108.825 64.97,108.537 64.97,107.041 IOH.92 ; ZU4.35 76.488,69.7 77.621,69.7 78.146,70.225 v1(78.2,70.225) ; C10.1 79.812,72.052 79.812,74.307 C12.1 80.72,74.32 v1(80.725,74.325) ; C1.1 101.65,72.675 102.2,73.225 ICSP.70 ; v1(102.975,77.975) 103.025,77.925 C6.1
M8RXD: R12.1 U3.9 | length 4.1
  Top Layer w0.2: U3.9 52.687,89.888 53.075,89.5 R12.1
M8TXD: R13.1 U3.8
MISO2: ICSP1.65 U3.17 | length 11.6
  Top Layer w0.2: U3.17 52.769,97.794 v1(52.772,97.797) v1@52.775,97.8
  Bottom Layer w0.2: ICSP1.65 53.523,105.142 53.54,105.142 54.05,104.633 54.05,99.075 v1(52.772,97.797)
MOSI2: ICSP1.68 U3.13 | length 13.2
  Top Layer w0.2: v1@49.975,93.725 v1(49.994,93.744) U3.13
  Bottom Layer w0.2: ICSP1.68 49.885,101.835 49.3,101.25 49.3,94.438 v1(49.994,93.744)
NetAD_71: AD.71 ZU4.56 | length 33
  Top Layer w0.2: ZU4.56 67.887,60.663 71.6,56.95 84.109,56.95 AD.71@89.609,51.45
NetAD_72: AD.72 ZU4.57 | length 32.1
  Top Layer w0.2: ZU4.57 69.412,61.513 72.275,58.65 84.949,58.65 AD.72
NetAD_73: AD.73 ZU4.58 | length 32.9
  Top Layer w0.2: ZU4.58 70.212,63.038 73.1,60.15 85.989,60.15 AD.73
NetAD_74: AD.74 ZU4.59 | length 33.9
  Top Layer w0.2: ZU4.59 71.012,64.363 73.625,61.75 86.929,61.75 AD.74
NetC5_2: C5.2 R9.2 | length 2.1
  Top Layer w0.2: R9.2 C5.2
NetICSP1_69: ICSP1.69 R16.1@39.2,79.7 U3.24 | length 30.9
  Top Layer w0.2: R16.1@39.2,79.7 39.25,79.7 40.95,81.4 40.958,81.4 41.075,81.517 v1(41.075,84.5) ; v1@45.2,95.75 v1(45.212,95.762) U3.24 45.212,105.662 45.79,106.24 ICSP1.69
  Bottom Layer w0.2: v1(41.075,84.5) 41.075,86.85 45.212,90.987 v1(45.212,95.762)
NetICSP_65: ICSP.65 IOH.90 ZU4.48 | length 74.3
  Top Layer w0.2: IOH.90 70.216,85.366 69.412,84.562 ZU4.48 69.587,75.025 69.587,74.122 71.059,72.65 v1(71.725,72.65)
  Bottom Layer w0.2: v1(71.725,72.65) 96.725,72.65 102.875,66.5 105.508,66.5 105.973,66.965 105.973,67.031 106.6,67.658 ICSP.65
NetICSP_68: ICSP.68 IOH.89 ZU4.47 | length 69.1
  Top Layer w0.2: v1(71.725,73.675) 70.6,73.675 70.212,74.063 ZU4.47 70.212,84.037 72.756,86.581 IOH.89
  Bottom Layer w0.2: v1(71.725,73.675) 101.07,73.675 ICSP.68
NetIOH_86: IOH.86 ZU4.44 | length 34.9
  Top Layer w0.2: ZU4.44 72.612,78.937 80.376,86.701 IOH.86@80.376,106.875
NetIOH_87: IOH.87 ZU4.45 | length 34.2
  Top Layer w0.2: ZU4.45 71.812,79.762 77.625,85.575 77.625,106.664 IOH.87
NetIOH_88: IOH.88 ZU4.46 | length 33.4
  Top Layer w0.2: ZU4.46 71.012,81.862 75.296,86.146 IOH.88
NetIOL_78: IOL.78 R12.2 ZU4.62 | length 138.6
  Top Layer w0.2: R12.2 59.425,89.5 59.85,89.925 59.85,98.5 55.975,102.375 55.975,107.925 57.975,109.925 65.125,109.925 66.375,108.675 101.185,108.675 IOL.78@103.06,106.8 ; v1(72.925,69.425) 73.412,68.938 ZU4.62
  Bottom Layer w0.2: v1(72.925,69.425) 70.575,69.425 70.075,69.925 70.075,77.85 72.325,80.1 89.475,80.1 103.06,93.685 IOL.78@103.06,106.8
NetIOL_79: IOL.79 R13.2 ZU4.63 | length 106.7
  Top Layer w0.2: v1(50.875,84.675) R13.2 ; ZU4.63 74.212,69.062 v1(74.225,69.075)
  Bottom Layer w0.2: v1(50.875,84.675) 52.3,83.25 52.3,82.9 52.375,82.825 52.375,74.725 60.725,66.375 72.725,66.375 74.225,67.875 v1(74.225,69.075) 73.6,68.45 70.7,68.45 69.3,69.85 69.3,79.225 71.875,81.8 89,81.8 100.52,93.32 IOL.79
NetIOL_80: IOL.80 ZU4.64 | length 91.4
  Top Layer w0.2: v1@74.925,68.4 v1(75.012,68.313) ZU4.64
  Bottom Layer w0.2: v1(75.012,68.313) 75.7,69 97.325,69 101.925,64.4 107.975,64.4 109.025,65.45 109.025,74.025 108.15,74.9 106.3,74.9 105.075,76.125 105.075,107.45 103.975,108.55 99.73,108.55 IOL.80
NetIOL_81: IOL.81 ZU4.33 | length 96.2
  Top Layer w0.2: ZU4.33 v1(76.462,66.863) v1@76.475,66.85
  Bottom Layer w0.2: v1(76.462,66.863) 76.462,67.813 76.975,68.325 96.7,68.325 101.75,63.275 108,63.275 109.5,64.775 109.5,75.45 108.65,76.3 106.775,76.3 106,77.075 106,107.85 104.475,109.375 97.716,109.375 95.44,107.099 IOL.81
NetIOL_82: IOL.82 ZU4.34 | length 100.5
  Top Layer w0.2: ZU4.34 76.637,68.7 77.337,68.7 78.179,67.857 78.179,67.546 v1(78.275,67.45)
  Bottom Layer w0.2: v1(78.275,67.45) 96.45,67.45 101.65,62.25 108.325,62.25 110.4,64.325 110.4,76.075 108.925,77.55 106.992,77.55 106.825,77.717 106.825,108.375 105.025,110.175 96.275,110.175 IOL.82
NetIOL_83: IOL.83 ZU4.41 | length 38
  Top Layer w0.2: ZU4.41 75.012,75.725 90.36,91.073 IOL.83
NetIOL_84: IOL.84 ZU4.42 | length 37.2
  Top Layer w0.2: ZU4.42 74.212,76.937 82.575,85.3 82.575,85.325 87.82,90.57 IOL.84
NetIOL_85: IOL.85 ZU4.43 | length 36.5
  Top Layer w0.2: ZU4.43 73.412,78.062 85.28,89.93 IOL.85
NetL_2: L.2 R6.1 U4.6 | length 4.3
  Top Layer w0.2: R6.1 57.35,76.075 L.2 ; R6.1@57.3,76.025 57.405,75.92 57.405,73.805 U4.6
NetON_1: ON.1 R15.2 R16.2@56.9,96.95 | length 2.6
  Top Layer w0.2: R15.2 56.9,96.95 ON.1
NetR6_2: R6.2 U4.7 | length 2.3
  Top Layer w0.2: U4.7 56.19,75.79 56.35,75.95 R6.2
NetR7_1: R7.1 X2.2 Z2.2 | length 9.5
  Top Layer w0.2: X2.2 36.725,91.125 cw(c36.725,90.9) 36.95,90.9 36.95,90.225 ccw(c37.15,90.225) 37.15,90.025 ccw(c37.15,90.125) 37.25,90.125 37.25,90.8 cw(c37.45,90.8) 37.45,91 cw(c37.45,90.875) 37.575,90.875 37.575,90.3 ccw(c37.775,90.3) 37.775,90.1 37.8,90.1 ccw(c37.8,90.175) 37.875,90.175 37.875,90.75 cw(c38.05,90.75) 38.05,90.925 cw(c38.05,90.775) 38.2,90.775 38.2,90.475 ccw(c38.525,90.475) 38.525,90.15 Z2.2@39.375,90.15 ; Z2.2 Z2.2@39.375,90.15 ; R7.1@39.925,91.85 R7.1@39.943,91.867 ; R7.1 R7.1@39.943,91.867 ; R7.1@39.992,91.867 R7.1@39.943,91.867 ; Z2.2@39.375,90.15 39.375,91.7 39.542,91.867 R7.1@39.943,91.867
NetR8_1: R8.1 X2.3 Z1.2 | length 10.8
  Top Layer w0.2: X2.3 34.075,91.19 34.075,94.275 34.575,94.775 Z1.2 39.333,94.743 39.333,93.392 39.5,93.225 R8.1
NetR10_1: R10.1 TX.2 | length 1.4
  Top Layer w0.2: TX.2 56.9,92.5 R10.1
NetR11_1: R11.1 RX.2 | length 1.3
  Top Layer w0.2: RX.2 56.925,90.9 R11.1
NetRX_1: RX.1 U3.10 | length 2.7
  Top Layer w0.2: U3.10@52.69,91.303 53.972,91.303 54.328,90.947 55.253,90.947 RX.1@55.278,90.972
NetT1_1: T1.1 U5.7 | length 12.2
  Top Layer w0.2: U5.7 44.15,69.475 44.65,68.975 45.95,68.975 46.2,68.725 46.2,61.925 46.775,61.35 47.475,61.35 T1.1
NetTX_1: TX.1 U3.11 | length 2.7
  Top Layer w0.2: U3.11 53.969,92.144 54.325,92.5 55.25,92.5 TX.1
PWRIN: D1.2 X1.2 | length 13.9
  Top Layer w0.5: X1.2 29.2,58.675 32.575,55.3 36.175,55.3 37.5,56.625 D1.2
RD+: R8.2 U3.29 | length 2.7
  Top Layer w0.2: R8.2@40.828,93.247 41.553,93.247 41.847,92.953 U3.29@43.44,92.953
RD-: R7.2 U3.30 | length 2.7
  Top Layer w0.2: R7.2 41.575,91.875 41.869,92.169 U3.30
RESET: C5.1 ICSP.69 POWER.1 R14.1 SW1.1 SW1.2 ZU4.61 | length 149.6
  Top Layer w0.2: SW1.1 SW1.2 36.107,106.3 C5.1 40.025,106.3 v1(40.05,106.325) ; ZU4.61 72.635,66.677 72.635,65.465 72.954,65.146 73.379,65.146 v1(73.475,65.05) 92.925,65.05 94.15,66.275 v1(94.15,75.825) ; ICSP.69 108.175,73.225 108.8,73.85 R14.1
  Bottom Layer w0.2: v1(40.05,106.325) 40.05,84.2 59.2,65.05 v1(73.475,65.05) 73.475,58.225 75.425,56.275 82.275,56.275 84.705,53.845 POWER.1@84.705,51.45 ; v1(94.15,75.825) 104,75.825 ICSP.69
SCK: ICSP.67 IOH.91 U4.5 ZU4.49 | length 92
  Top Layer w0.2: U4.5 58.805,73.675 ZU4.49@67.851,73.675 ; IOH.91 67.676,73.85 ZU4.49@67.851,73.675 ; v1(71.75,71.55) 71.654,71.646 71.104,71.646 69.075,73.675 ZU4.49 ZU4.49@67.851,73.675
  Bottom Layer w0.2: v1(71.75,71.55) 95.95,71.55 101.975,65.525 107.8,65.525 108.575,66.3 108.575,68.71 ICSP.67
SCK2: ICSP1.67 U3.15 | length 22.2
  Top Layer w0.2: v1@50.7,95.35 v1(50.706,95.344) U3.15
  Bottom Layer w0.2: ICSP1.67 51.62,107.975 54.15,107.975 54.775,107.35 54.775,98.225 51.894,95.344 v1(50.706,95.344)
USBVCC: C8.2 F1.2 T1.3 U3.31 | length 44.3
  Top Layer w0.5: C8.2@37.125,80.725 37.125,80.75 40.125,83.75 40.125,87.225 42.012,89.112 42.012,91.037 42.319,91.344 43.437,91.344 U3.31 ; v1(37.9,80.275) 37.05,80.275 C8.2 36.85,84.25 37.175,84.575 F1.2 ; v1(47.3,63.5) 47.325,63.525 T1.3
  Bottom Layer w0.5: v1(37.9,80.275) 37.9,77.7 39.3,76.3 40.95,76.3 44.325,72.925 44.325,64.775 45.6,63.5 v1(47.3,63.5)
USHIELD: L1.2 X2.5 X2.6 Z1.1 Z2.1 | length 40.9
  Top Layer w0.2: L1.2 32,80.875 31.3,81.575 X2.6 X2.6@31.3,84.504 ; Z1.1 40.885,95.54 40.53,95.895 X2.5 X2.6@31.3,84.504 ; Z2.1 40.91,89.56 40.733,89.383 37.112,89.383 36.67,89.825 33.05,89.825 32.425,89.2 32.425,85.629 X2.6@31.3,84.504
VIN: D1.1 IC1.3 PC1.1 POWER.6 R4.2 | length 55
  Top Layer w1: R4.2 37.625,66 IC1.3 37.6,60.549 D1.1 37.799,60.15 39.775,60.15 40.775,59.15 40.775,52 41.675,51.1 PC1.1 46.9,51.1 49.775,48.225 70.825,48.225 72.005,49.405 POWER.6
XT1: C9.2 R1.1 U3.1 Y1.2 | length 11.7
  Top Layer w0.2: R1.1 43.9,79.45 43.625,79.725 Y1.2 43.625,85.39 C9.2 43.635,86.485 43.775,86.625 44.5,86.625 45.262,87.387 U3.1
XT2: C11.2 R1.2 U3.2 Y1.1 | length 11.7
  Top Layer w0.2: U3.2@46.069,88.913 46.069,87.356 46.831,86.594 47.556,86.594 47.696,86.454 C11.2@47.696,85.369 ; R1.2@46.238,79.413 47.262,79.413 47.537,79.688 Y1.1@47.537,82.612 ; Y1.1 47.725,85.325 C11.2
XTAL1: C10.2 R2.1 Y2.2 ZU4.39 | length 7.6
  Top Layer w0.2: ZU4.39@76.463,72.85 76.476,72.863 77.611,72.863 77.724,72.75 78.176,72.75 R2.1@78.313,72.613 ; R2.1 78.375,71.475 78.675,71.175 79.81,71.175 C10.2 82.615,71.16 Y2.2
XTAL2: C12.2 R2.2 Y2.1 ZU4.40 | length 7.5
  Top Layer w0.2: ZU4.40 76.475,73.662 77.61,73.662 77.723,73.775 78.175,73.775 R2.2 78.375,75.05 78.525,75.2 C12.2 79.825,75.225 Y2.1
XUSB: F1.1 X2.1 | length 4.7
  Top Layer w0.2: X2.1 36.01,86.515 36.5,86.025 F1.1
pads on no net: SW1.5 U2.4 U3.5 U3.6 U3.7 U3.12 U3.14 U3.16 U3.18 U3.19 U3.20 U3.21 U3.22 U3.23 U3.25 U3.26 U3.27 U4.1 U4.2 U4.3 U4.4 U4.8 U5.1 U5.2 U5.3 U5.4 U5.8 ZU4.37 ZU4.38 ZU4.51 ZU4.53 ZU4.54 ZU4.55

## Polygon pours and split planes (outlines as drawn)
GND on Bottom Layer "GND_L02_P000" (solid, pour order 0): 29.15,50.125 29.275,50 106.775,50 106.775,55 110.05,58.275 110.05,76.9 106.65,80.3 106.65,107.825 29.575,107.825 29.425,107.975

## Silkscreen, mask and mechanical layers (free items; w line width, h text height)
Top Overlay:
  lines w0.2: 69.425,102.65 103.925,102.65 ; 71.125,56.975 86.025,56.975 ; 87.775,55.875 104.125,55.875
  text "4" at 92.504,103.879 h1
  text "3" at 95.054,103.879 h1
  text "1" at 100.179,103.854 h1
  text "5" at 90.104,103.829 h1
  text "2" at 97.604,103.829 h1
  text "0" at 102.679,103.829 h1
  text "9" at 77.454,103.729 h1
  text "8" at 79.929,103.729 h1
  text "6" at 87.529,103.704 h1
  text "11" at 72.529,103.654 h1
  text "10" at 74.854,103.654 h1
  text "7" at 85.029,103.654 h1
  text "12" at 69.679,103.629 h1
  text "13" at 66.979,103.529 h1
  text "A1" at 92.721,53.304 h1 r90
  text "A2" at 95.171,53.279 h1 r90
  text "A3" at 97.771,53.254 h1 r90
  text "A0" at 90.171,53.229 h1 r90
  text "A4" at 100.296,53.229 h1 r90
  text "A5" at 102.871,53.204 h1 r90
  text "GND" at 75.046,53.079 h1 r90
  text "GND" at 77.596,53.079 h1 r90
  text "RES" at 85.296,52.929 h1 r90
  text "VIN" at 72.546,52.879 h1 r90
  text "+3V3" at 82.721,52.779 h1 r90
  text "+5V" at 80.146,52.754 h1 r90
Bottom Overlay:
  text "ZxKp" at 35.071,47.512 h1.52
Mechanical 1:
  lines w0.2: 25.65,45.525 109,45.525 109,53.7 111.775,56.475 111.775,65.15 111.775,79.775 108.725,82.825 108.725,111.05 25.675,111.05 25.65,111.05 25.65,49 25.65,45.525